# EAGLE board CT_schematic (EAGLE 7.6.0)

Size 100 x 80 mm. Coordinates in mm from the lower left corner, seen from the top.
Outline: 0,0 100,0 100,80 0,80 0,0
Copper layers (1*16): Top 0.035mm / dielectric 1.5mm / Bottom 0.035mm
Design rules "default": minimum track width 10mil, minimum drill 24mil, track to track 8mil, track to pad 8mil, pad to pad 8mil, via to via 8mil, smd to smd 8mil, copper to edge 40mil, drill to drill 8mil, minimum pad ring 10mil, minimum via ring 8mil, stop-mask expansion 4mil, vias tented up to drill 0mil, thermal gap 10mil

## Footprints (pad centres in the part's own frame; a part is rotated, then mirrored left to right if it is on the bottom)
C0603 = smd 0.8 x 0.8: 1 -0.762,0; 2 0.762,0
C0402 = smd 0.5 x 0.5: 1 -0.508,0; 2 0.508,0
C0805 = smd 1.2 x 1.3: 1 -1.016,0; 2 1.016,0
2220 = smd 1.85 x 5.5: 1 -2.55,0; 2 2.55,0
EXV-9H = smd 3.505 x 1.676: 1 -2.857,0; 2 2.857,0
L0603 = smd 0.8 x 0.8: 1 -0.762,0; 2 0.762,0
L1210 = smd 1.2 x 2.5: 1 -1.524,0; 2 1.524,0
DR1040 = smd 1.6 x 3.2: 1 -4.458,0; 2 4.458,0
PJ-037B_PACKAGE = drill 3.7 square: 1 12,0 | drill 3.2 square: 2 6,0
R0603 = smd 0.8 x 0.8: 1 -0.762,0; 2 0.762,0
UFBGA169 = smd 0.35 x 0.35: A1 -3.9,3.9; A2 -3.25,3.9; A3 -2.6,3.9; A4 -1.95,3.9; A5 -1.3,3.9; A6 -0.65,3.9; A7 0,3.9; A8 0.65,3.9; A9 1.3,3.9; A10 1.95,3.9; A11 2.6,3.9; A12 3.25,3.9; A13 3.9,3.9; B1 -3.9,3.25; B2 -3.25,3.25; B3 -2.6,3.25; B4 -1.95,3.25; B5 -1.3,3.25; B6 -0.65,3.25; B7 0,3.25; B8 0.65,3.25; B9 1.3,3.25; B10 1.95,3.25; B11 2.6,3.25; B12 3.25,3.25; B13 3.9,3.25; C1 -3.9,2.6; C2 -3.25,2.6; C3 -2.6,2.6; C4 -1.95,2.6; C5 -1.3,2.6; C6 -0.65,2.6; C7 0,2.6; C8 0.65,2.6; C9 1.3,2.6; C10 1.95,2.6; C11 2.6,2.6; C12 3.25,2.6; C13 3.9,2.6; D1 -3.9,1.95; D2 -3.25,1.95; D3 -2.6,1.95; D4 -1.95,1.95; D5 -1.3,1.95; D6 -0.65,1.95; D7 0,1.95; D8 0.65,1.95; D9 1.3,1.95; D10 1.95,1.95; D11 2.6,1.95; D12 3.25,1.95; D13 3.9,1.95; E1 -3.9,1.3; E2 -3.25,1.3; E3 -2.6,1.3; E4 -1.95,1.3; E5 -1.3,1.3; E6 -0.65,1.3; E7 0,1.3; E8 0.65,1.3; E9 1.3,1.3; E10 1.95,1.3; E11 2.6,1.3; E12 3.25,1.3; E13 3.9,1.3; F1 -3.9,0.65; F2 -3.25,0.65; F3 -2.6,0.65; F4 -1.95,0.65; F5 -1.3,0.65; F6 -0.65,0.65; F7 0,0.65; F8 0.65,0.65; F9 1.3,0.65; F10 1.95,0.65; F11 2.6,0.65; F12 3.25,0.65; F13 3.9,0.65; G1 -3.9,0; G2 -3.25,0; G3 -2.6,0; G4 -1.95,0; G5 -1.3,0; G6 -0.65,0; G7 0,0; G8 0.65,0; G9 1.3,0; G10 1.95,0; G11 2.6,0; G12 3.25,0; G13 3.9,0; H1 -3.9,-0.65; H2 -3.25,-0.65; H3 -2.6,-0.65; H4 -1.95,-0.65; H5 -1.3,-0.65; H6 -0.65,-0.65; H7 0,-0.65; H8 0.65,-0.65; H9 1.3,-0.65; H10 1.95,-0.65; H11 2.6,-0.65; H12 3.25,-0.65; H13 3.9,-0.65; J1 -3.9,-1.3; J2 -3.25,-1.3; J3 -2.6,-1.3; J4 -1.95,-1.3; J5 -1.3,-1.3; J6 -0.65,-1.3; J7 0,-1.3; J8 0.65,-1.3; J9 1.3,-1.3; J10 1.95,-1.3; J11 2.6,-1.3; J12 3.25,-1.3; J13 3.9,-1.3; K1 -3.9,-1.95; K2 -3.25,-1.95; K3 -2.6,-1.95; K4 -1.95,-1.95; K5 -1.3,-1.95; K6 -0.65,-1.95; K7 0,-1.95; K8 0.65,-1.95; K9 1.3,-1.95; K10 1.95,-1.95; K11 2.6,-1.95; K12 3.25,-1.95; K13 3.9,-1.95; L1 -3.9,-2.6; L2 -3.25,-2.6; L3 -2.6,-2.6; L4 -1.95,-2.6; L5 -1.3,-2.6; L6 -0.65,-2.6; L7 0,-2.6; L8 0.65,-2.6; L9 1.3,-2.6; L10 1.95,-2.6; L11 2.6,-2.6; L12 3.25,-2.6; L13 3.9,-2.6; M1 -3.9,-3.25; M2 -3.25,-3.25; M3 -2.6,-3.25; M4 -1.95,-3.25; M5 -1.3,-3.25; M6 -0.65,-3.25; M7 0,-3.25; M8 0.65,-3.25; M9 1.3,-3.25; M10 1.95,-3.25; M11 2.6,-3.25; M12 3.25,-3.25; M13 3.9,-3.25; N1 -3.9,-3.9; N2 -3.25,-3.9; N3 -2.6,-3.9; N4 -1.95,-3.9; N5 -1.3,-3.9; N6 -0.65,-3.9; N7 0,-3.9; N8 0.65,-3.9; N9 1.3,-3.9; N10 1.95,-3.9; N11 2.6,-3.9; N12 3.25,-3.9; N13 3.9,-3.9
ARDUCAM = drill 1 pad 1.8 square: 1 0,0 | drill 1 pad 1.8: 2 0,2.54; 3 2.54,0; 4 2.54,2.54; 5 5.08,0; 6 5.08,2.54; 7 7.62,0; 8 7.62,2.54; 9 10.16,0; 10 10.16,2.54; 11 12.7,0; 12 12.7,2.54; 13 15.24,0; 14 15.24,2.54; 15 17.78,0; 16 17.78,2.54; 17 20.32,0; 18 20.32,2.54; 19 22.86,0; 20 22.86,2.54
SSOP-28 = smd 1.5 x 0.4: 1 -3.625,4.225; 2 -3.625,3.575; 3 -3.625,2.925; 4 -3.625,2.275; 5 -3.625,1.625; 6 -3.625,0.975; 7 -3.625,0.325; 8 -3.625,-0.325; 9 -3.625,-0.975; 10 -3.625,-1.625; 11 -3.625,-2.275; 12 -3.625,-2.925; 13 -3.625,-3.575; 14 -3.625,-4.225; 15 3.625,-4.225; 16 3.625,-3.575; 17 3.625,-2.925; 18 3.625,-2.275; 19 3.625,-1.625; 20 3.625,-0.975; 21 3.625,-0.325; 22 3.625,0.325; 23 3.625,0.975; 24 3.625,1.625; 25 3.625,2.275; 26 3.625,2.925; 27 3.625,3.575; 28 3.625,4.225
FCI_10118193-0001LF = smd 0.4 x 1.35: 1 -1.3,2.675; 2 -0.65,2.675; 3 0,2.675; 4 0.65,2.675; 5 1.3,2.675 | smd 1.6 x 1.4: 6 -3.2,2.45; 7 3.2,2.45 | smd 1.9 x 1.9: 8 -1.2,0; 9 1.2,0 | hole 0.5: -3.3,0; 3.3,0
SSOP-16 = smd 1.981 x 0.356: 1 -2.464,2.223; 2 -2.464,1.587; 3 -2.464,0.953; 4 -2.464,0.318; 5 -2.464,-0.318; 6 -2.464,-0.953; 7 -2.464,-1.587; 8 -2.464,-2.223; 9 2.464,-2.223; 10 2.464,-1.587; 11 2.464,-0.953; 12 2.464,-0.318; 13 2.464,0.318; 14 2.464,0.953; 15 2.464,1.587; 16 2.464,2.223
182-009-MALE = drill 1.194 pad 1.524 octagon: 1 -5.537,10.923; 2 -2.769,10.923; 3 0,10.923; 4 2.769,10.923; 5 5.537,10.923; 6 -4.153,8.08; 7 -1.384,8.08; 8 1.384,8.08; 9 4.153,8.08 | hole 3.048: -12.446,9.501; 12.446,9.501
ABS07-32.768KHZ-7-T = smd 1.1 x 2.4: 1 -2.5,0; 2 0,0
ABLS-12.000MHZ-B4-T = smd 5.6 x 2.8: 1 0,0; 2 9.5,0
ASFL1 = smd 1.7 x 1.5: 1 -1.27,-1.1; 2 1.27,-1.1; 3 1.27,1.1; 4 -1.27,1.1
IDT74FCT38072 = smd 0.51 x 1: 1 0,0; 2 1.27,0; 3 2.54,0; 4 3.81,0; 5 3.81,4.95; 6 2.54,4.95; 7 1.27,4.95; 8 0,4.95
QFN-16_EP = smd 0.805 x 0.3: 1 -1.452,0.75; 2 -1.452,0.25; 3 -1.452,-0.25; 4 -1.452,-0.75; 9 1.452,-0.75; 10 1.452,-0.25; 11 1.452,0.25; 12 1.452,0.75 | smd 0.3 x 0.805: 5 -0.75,-1.452; 6 -0.25,-1.452; 7 0.25,-1.452; 8 0.75,-1.452; 13 0.75,1.452; 14 0.25,1.452; 15 -0.25,1.452; 16 -0.75,1.452 | smd 1.55 x 1.55: 17 0,0
SON-6 = smd 0.55 x 0.3: 1 -0.355,0.5 | smd 0.52 x 0.3: 2 -0.37,0; 3 -0.37,-0.5; 4 0.37,-0.5; 5 0.37,0; 6 0.37,0.5
SW_4-1437565-2 = smd 1.4 x 2.1: 1 -2.23,4.55; 2 -2.23,-4.55; 3 2.23,4.55; 4 2.23,-4.55
LGM67K-G1J2-24-Z = smd 0.8 x 1.4: A -2,0; C 0,0
NC7SZ125M5X = smd 1.3 x 0.7: 1 -1.3,0.95; 2 -1.3,0; 3 -1.3,-0.95; 4 1.3,-0.95; 5 1.3,0.95

## Placement (x,y rotation side)
C1  1e-06  [C0603]  -34.29,68.58 0 top  (outside the outline)
C2  1e-07  [C0603]  -38.1,68.58 0 top  (outside the outline)
C3  1e-07  [C0603]  -41.91,68.58 0 top  (outside the outline)
C4  1e-07  [C0603]  -45.72,68.58 0 top  (outside the outline)
C5  1e-07  [C0603]  -49.53,68.58 0 top  (outside the outline)
C6  1e-07  [C0603]  -53.34,68.58 0 top  (outside the outline)
C7  1e-07  [C0603]  -57.15,68.58 0 top  (outside the outline)
C8  1e-07  [C0603]  -60.96,68.58 0 top  (outside the outline)
C9  1e-07  [C0603]  -64.77,68.58 0 top  (outside the outline)
C10  1e-07  [C0603]  -68.58,68.58 0 top  (outside the outline)
C11  1e-07  [C0603]  -72.39,68.58 0 top  (outside the outline)
C12  1e-07  [C0603]  -76.2,68.58 0 top  (outside the outline)
C13  1e-07  [C0603]  -15.24,73.66 0 top  (outside the outline)
C14  1e-07  [C0603]  -19.05,73.66 0 top  (outside the outline)
C15  1e-07  [C0603]  -22.86,73.66 0 top  (outside the outline)
C16  1e-07  [C0603]  -26.67,73.66 0 top  (outside the outline)
C17  4.7e-06  [C0603]  -19.05,68.58 0 top  (outside the outline)
C18  2.2e-06  [C0603]  -22.86,68.58 0 top  (outside the outline)
C19  2.2e-06  [C0603]  -26.67,68.58 0 top  (outside the outline)
C20  1e-08  [C0603]  -30.48,73.66 0 top  (outside the outline)
C21  1e-06  [C0603]  -34.29,73.66 0 top  (outside the outline)
C22  1e-07  [C0603]  -38.1,73.66 0 top  (outside the outline)
C23  1e-11  [C0402]  -30.48,78.74 0 top  (outside the outline)
C24  1e-11  [C0402]  -34.29,78.74 0 top  (outside the outline)
C25  1e-06  [C0603]  -41.91,73.66 0 top  (outside the outline)
C26  1e-07  [C0402]  -38.1,78.74 0 top  (outside the outline)
C27  4.7e-06  [C0805]  -77.47,55.88 0 top  (outside the outline)
C28  1e-07  [C0402]  -41.91,78.74 0 top  (outside the outline)
C29  1e-07  [C0402]  -45.72,78.74 0 top  (outside the outline)
C30  1e-06  [C0603]  -45.72,73.66 0 top  (outside the outline)
C31  1e-06  [C0603]  -49.53,73.66 0 top  (outside the outline)
C32  2.2e-07  [C0603]  -30.48,68.58 0 top  (outside the outline)
C33  1e-06  [C0603]  -53.34,73.66 0 top  (outside the outline)
C34  1e-06  [C0603]  -57.15,73.66 0 top  (outside the outline)
C35  1e-08  [C0402]  -49.53,78.74 0 top  (outside the outline)
C36  1e-08  [C0402]  -53.34,78.74 0 top  (outside the outline)
C37  1e-05  [C0805]  -15.24,63.5 0 top  (outside the outline)
C38  1e-06  [C0603]  -60.96,73.66 0 top  (outside the outline)
C39  1e-07  [C0402]  -57.15,78.74 0 top  (outside the outline)
C40  6.8e-05  [2220]  -16.51,40.64 0 top  (outside the outline)
C41  1e-07  [C0402]  -60.96,78.74 0 top  (outside the outline)
C42  0.0001  [EXV-9H]  -71.12,40.64 0 top  (outside the outline)
C43  0.0001  [EXV-9H]  -17.78,49.53 0 top  (outside the outline)
C44  1e-08  [C0402]  -64.77,78.74 0 top  (outside the outline)
C45  1e-08  [C0402]  -68.58,78.74 0 top  (outside the outline)
F1  240.0  [L0603]  -64.77,73.66 0 top  (outside the outline)
I1  1e-05  [L1210]  -59.69,57.15 0 top  (outside the outline)
I2  5.2e-06  [DR1040]  -54.61,27.94 0 top  (outside the outline)
J1  PJ-037B  [PJ-037B_PACKAGE]  -27.94,29.21 0 top  (outside the outline)
R2  1000.0  [R0603]  -68.58,73.66 0 top  (outside the outline)
R4  4700.0  [R0603]  -72.39,73.66 0 top  (outside the outline)
R5  4700.0  [R0603]  -76.2,73.66 0 top  (outside the outline)
R6  10000.0  [R0603]  -40.64,63.5 0 top  (outside the outline)
R7  10000.0  [R0603]  -45.72,63.5 0 top  (outside the outline)
R8  10000.0  [R0603]  -50.8,63.5 0 top  (outside the outline)
R9  4700.0  [R0603]  -15.24,78.74 0 top  (outside the outline)
R10  10000.0  [R0603]  -55.88,63.5 0 top  (outside the outline)
R11  10000.0  [R0603]  -60.96,63.5 0 top  (outside the outline)
R12  100000.0  [R0603]  -20.32,63.5 0 top  (outside the outline)
R13  20000.0  [R0603]  -66.04,63.5 0 top  (outside the outline)
R14  91000.0  [R0603]  -71.12,63.5 0 top  (outside the outline)
R15  300000.0  [R0603]  -25.4,63.5 0 top  (outside the outline)
R16  10000.0  [R0603]  -76.2,63.5 0 top  (outside the outline)
R17  10000.0  [R0603]  -15.24,68.58 0 top  (outside the outline)
R18  9100.0  [R0603]  -19.05,78.74 0 top  (outside the outline)
R19  680000.0  [R0603]  -30.48,63.5 0 top  (outside the outline)
R20  120000.0  [R0603]  -35.56,63.5 0 top  (outside the outline)
U1  STM32F479AGH6  [UFBGA169]  -76.2,7.62 0 top  (outside the outline)
U2  arducam_ov2640  [ARDUCAM]  -40.64,54.61 0 top  (outside the outline)
U3  FT232RL-REEL  [SSOP-28]  -60.96,7.62 0 top  (outside the outline)
U4  10118193-0001LF  [FCI_10118193-0001LF]  -43.18,39.37 0 top  (outside the outline)
U5  LTC2804CGN-1#PBF  [SSOP-16]  -76.2,27.94 0 top  (outside the outline)
U6  182-009-113R531  [182-009-MALE]  -36.83,6.35 0 top  (outside the outline)
U7  ABS07-32.768KHZ-7-T  [ABS07-32.768KHZ-7-T]  -58.42,49.53 0 top  (outside the outline)
U8  ABLS-12.000MHZ-B4-T  [ABLS-12.000MHZ-B4-T]  -39.37,49.53 0 top  (outside the outline)
U9  ASFL1-25MHZ-NCS  [ASFL1]  -34.29,40.64 0 top  (outside the outline)
U10  idt74fct38072  [IDT74FCT38072]  -64.77,38.1 0 top  (outside the outline)
U11  LTC3601EUD#PBF  [QFN-16_EP]  -24.13,78.74 0 top  (outside the outline)
U12  TPS3895ADRYR  [SON-6]  -71.12,77.47 0 top  (outside the outline)
U13  4-1437565-2  [SW_4-1437565-2]  -44.45,27.94 0 top  (outside the outline)
U14  Q65110A2395  [LGM67K-G1J2-24-Z]  -48.26,57.15 0 top  (outside the outline)
U15  nc7sz125m5x  [NC7SZ125M5X]  -64.77,55.88 0 top  (outside the outline)
U16  nc7sz125m5x  [NC7SZ125M5X]  -71.12,55.88 0 top  (outside the outline)

## Library data of the parts
C1-C45 F1 I1 I2 J1 R2 R4-R20 U1-U16 = circuit_tree

## Nets
CLK_CRYSTAL_U1_E1: C23.1 U1.E1 U7.1
CLK_CRYSTAL_U1_F1: C24.1 U1.F1 U7.2
CLK_CRYSTAL_U3_27: U3.27 U8.1
CLK_CRYSTAL_U3_28: U3.28 U8.2
CLK_U1_G2: U1.G2 U10.6
CLK_U2_8: U2.8 U10.7
CLK_U10_3: U9.3 U10.3
GND: C1.2 C2.2 C3.2 C4.2 C5.2 C6.2 C7.2 C8.2 C9.2 C10.2 C11.2 C12.2 C13.2 C14.2 C15.2 C16.2 C17.2 C18.2 C19.2 C20.2 C21.2 C22.2 C23.2 C24.2 C25.2 C26.2 C27.2 C28.2 C29.2 C30.2 C31.2 C33.2 C34.2 C35.2 C36.2 C37.2 C38.2 C40.1 C40.2 C41.2 C42.2 C43.2 C44.2 C45.2 J1.2 R2.2 R8.2 R11.2 R13.2 R15.2 R18.2 R20.2 U1.D11 U1.E3 U1.F5 U1.F8 U1.G7 U1.G9 U1.H11 U1.J1 U1.J2 U1.J6 U1.J7 U1.J10 U1.K11 U1.M9 U2.2 U2.20 U3.7 U3.18 U3.21 U3.25 U3.26 U4.5 U4.6 U4.7 U4.8 U4.9 U5.8 U6.5 U9.2 U10.4 U10.5 U10.8 U11.1 U11.9 U11.17 U12.2 U14.C U15.1 U15.3 U16.1 U16.3
NET_U1_A5: R7.1 U1.A5
NET_U1_C3: R6.1 U1.C3
NET_U1_D12: C19.1 U1.D12
NET_U1_H2: R4.1 U1.H2 U15.4
NET_U1_J3: C20.1 C21.1 F1.1 U1.J3
NET_U1_J11: U1.J11
NET_U1_K12: U1.K12
NET_U1_L5: R8.1 U1.L5
NET_U1_N9: C18.1 U1.N9
NET_U1_N12: U14.A
NET_U1_N13: U13.3 U13.4
NET_U2_19: R5.1 U2.19 U16.4
NET_U3_14: R10.1 U3.14
NET_U3_17: C28.1 U3.17
NET_U3_19: R11.1 U3.19
NET_U4_1: R9.1 U4.1
NET_U4_2: U3.16 U4.2
NET_U4_3: U3.15 U4.3
NET_U4_19: R9.2
NET_U5_6: C30.1 U5.6
NET_U5_7: C32.1 I1.2 U5.7
NET_U5_9: C31.1 U5.9
NET_U5_10: C32.2 U5.10
NET_U5_11: R12.1 U5.11
NET_U6_2: U5.1 U6.2
NET_U6_3: U5.3 U6.3
NET_U6_7: U5.2 U6.7
NET_U6_8: U5.4 U6.8
NET_U11_3: C39.2 I2.1 U11.3 U11.4
NET_U11_6: C39.1 U11.6
NET_U11_7: C38.1 U11.7 U11.12
NET_U11_10: R15.1 U11.10
NET_U11_11: R13.1 R14.1 U11.11
NET_U11_14: U11.14
NET_U11_ATNET_3: I2.2 R14.2
NET_U12_1: R17.1 R18.1 U12.1
NET_U12_3: R19.2 R20.1 U12.3
NET_U12_4: R16.1 U12.4 U15.2 U16.2
NET_U13_1: R2.1 U13.1 U13.2
PROC_DCMI_D0: U1.E8 U2.18
PROC_DCMI_D1: U1.E9 U2.17
PROC_DCMI_D2: U1.A4 U2.16
PROC_DCMI_D3: U1.A3 U2.15
PROC_DCMI_D4: U1.C2 U2.14
PROC_DCMI_D5: U1.B3 U2.13
PROC_DCMI_D6: U1.A1 U2.12
PROC_DCMI_D7: U1.B1 U2.11
PROC_DCMI_D8: U1.C11 U2.10
PROC_DCMI_D9: U1.B12 U2.9
PROC_DCMI_HSYNC: U1.H8 U2.6
PROC_DCMI_PIXCLK: U1.N3 U2.7
PROC_DCMI_VSYNC: U1.A2 U2.5
PROC_UART4_RX: U1.B9 U3.1
PROC_UART4_TX: U1.C10 U3.5
PROC_UART5_RX: U5.16
PROC_UART5_TX: U5.14
VCC_S1_12V9: C37.1 C42.1 C43.1 J1.1 U11.15 U11.16
VCC_TIER1_3V3: C1.1 C2.1 C3.1 C4.1 C5.1 C6.1 C7.1 C8.1 C9.1 C10.1 C11.1 C12.1 C13.1 C14.1 C15.1 C16.1 C17.1 C22.1 C25.1 C26.1 C27.1 C29.1 C33.1 C34.1 C35.1 C36.1 C40.2 C41.1 C44.1 C45.1 F1.2 I1.1 I2.2 R4.2 R5.2 R6.2 R7.2 R10.2 R12.2 R14.2 R16.2 R17.2 R19.1 U1.D3 U1.D10 U1.E5 U1.F4 U1.F7 U1.G8 U1.G11 U1.J4 U1.K6 U1.K10 U1.K13 U1.L6 U1.L9 U2.1 U3.4 U3.20 U5.5 U5.12 U9.4 U10.1 U10.2 U11.8 U12.6 U15.5 U16.5

## Tracks (layer width: path | path; a pad name or v marks a point on that pad's centre or on a via)
CLK_CRYSTAL_U1_E1  (2 unrouted)
CLK_CRYSTAL_U1_F1  (2 unrouted)
CLK_CRYSTAL_U3_27  (1 unrouted)
CLK_CRYSTAL_U3_28  (1 unrouted)
CLK_U1_G2  (1 unrouted)
CLK_U2_8  (1 unrouted)
CLK_U10_3  (1 unrouted)
GND  (92 unrouted)
NET_U1_A5  (1 unrouted)
NET_U1_C3  (1 unrouted)
NET_U1_D12  (1 unrouted)
NET_U1_H2  (2 unrouted)
NET_U1_J3  (3 unrouted)
NET_U1_L5  (1 unrouted)
NET_U1_N9  (1 unrouted)
NET_U1_N13  (1 unrouted)
NET_U2_19  (2 unrouted)
NET_U3_14  (1 unrouted)
NET_U3_17  (1 unrouted)
NET_U3_19  (1 unrouted)
NET_U4_1  (1 unrouted)
NET_U4_2  (1 unrouted)
NET_U4_3  (1 unrouted)
NET_U5_6  (1 unrouted)
NET_U5_7  (2 unrouted)
NET_U5_9  (1 unrouted)
NET_U5_10  (1 unrouted)
NET_U5_11  (1 unrouted)
NET_U6_2  (1 unrouted)
NET_U6_3  (1 unrouted)
NET_U6_7  (1 unrouted)
NET_U6_8  (1 unrouted)
NET_U11_3  (3 unrouted)
NET_U11_6  (1 unrouted)
NET_U11_7  (2 unrouted)
NET_U11_10  (1 unrouted)
NET_U11_11  (2 unrouted)
NET_U11_ATNET_3  (1 unrouted)
NET_U12_1  (2 unrouted)
NET_U12_3  (2 unrouted)
NET_U12_4  (3 unrouted)
NET_U13_1  (2 unrouted)
PROC_DCMI_D0  (1 unrouted)
PROC_DCMI_D1  (1 unrouted)
PROC_DCMI_D2  (1 unrouted)
PROC_DCMI_D3  (1 unrouted)
PROC_DCMI_D4  (1 unrouted)
PROC_DCMI_D5  (1 unrouted)
PROC_DCMI_D6  (1 unrouted)
PROC_DCMI_D7  (1 unrouted)
PROC_DCMI_D8  (1 unrouted)
PROC_DCMI_D9  (1 unrouted)
PROC_DCMI_HSYNC  (1 unrouted)
PROC_DCMI_PIXCLK  (1 unrouted)
PROC_DCMI_VSYNC  (1 unrouted)
PROC_UART4_RX  (1 unrouted)
PROC_UART4_TX  (1 unrouted)
VCC_S1_12V9  (5 unrouted)
VCC_TIER1_3V3  (67 unrouted)